# Altium PCB DashDataDisplayPCB.PcbDoc (part 2 of 4)
Units mm, origin at the board's own origin, x right, y up, seen from the top; angles counter-clockwise.
Board outline 152.4 x 101.6 mm, 2 copper layers (Top Layer, Bottom Layer); 143 components, 97 nets, 509 pads, 233 vias.
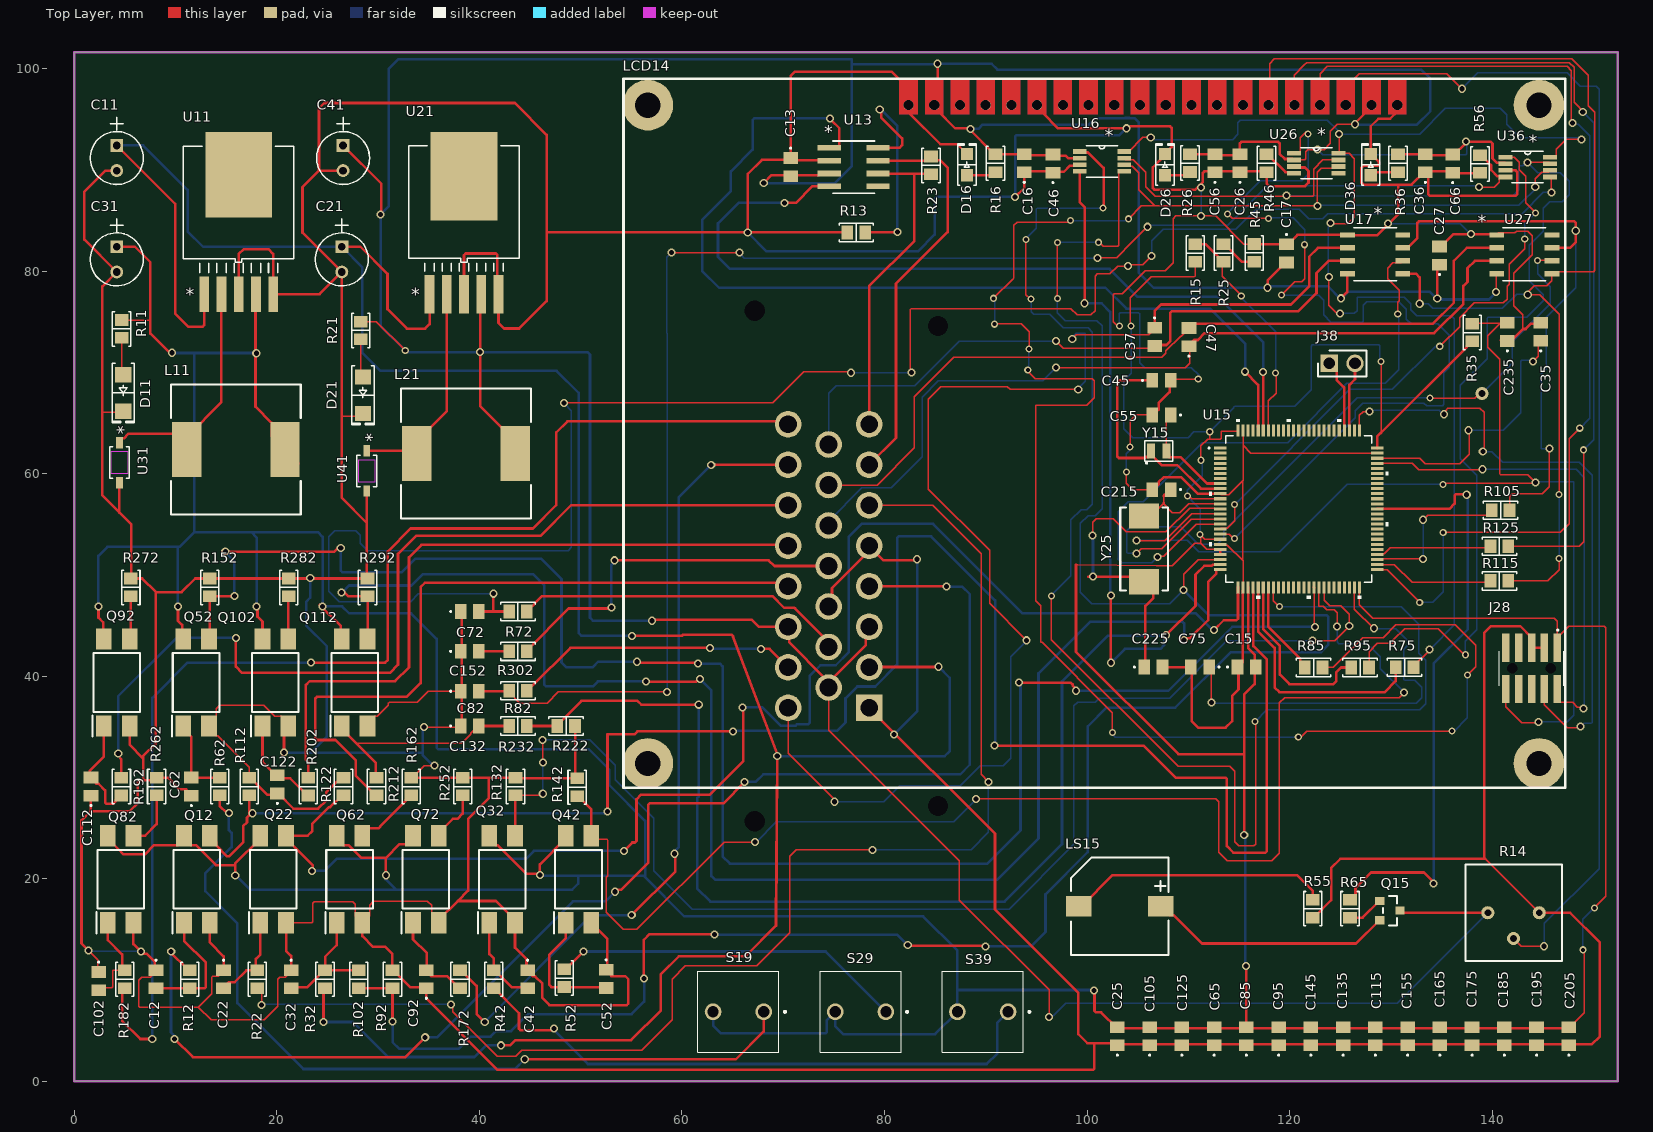
[diagram p0: Top Layer view]

## Part data (continued)
R45: library part AA0805JR-070RL, "RES SMD 0 OHM JUMPER 1/8W 0805", Device Package="0805 (2012 Metric)", manufacturer=Yageo, Operating Temperature="-55°C ~ 155°C", Ratings=AEC-Q200, Supplier Device Package=0805, Supplier Part Number 1=13-AA0805JR-070RLCT-ND, Tolerance=Jumper, componentlink1description=Datasheet, componentlink1url=https://www.yageo.com/upload/media/product/productsearch/datasheet/rchip/PYu-AA_51_RoHS_L_3.pdf, componentlink2description="DigiKey Link", componentlink2url=https://www.digikey.com/en/products/detail/yageo/AA0805JR-070RL/5890455, Composition="Thick Film", Features="Anti-Sulfur, Automotive AEC-Q200, Moisture Resistant", Height - Seated (Max)="0.024\" (0.60mm)", lastupdated="2/8/2024 21:00:22", Lifecycle Status=Active, Minimum Order=1, Number of Terminations=2, Package / Case="0805 (2012 Metric)", packaging=TapeAndReel, Part Number=AA0805JR-070RL, Part Status=Active, partid=74756, price=0.01, Resistance="0 Ohms", series=AA, Size / Dimension="0.079\" L x 0.049\" W (2.00mm x 1.25mm)", Supplier 1=DigiKey
R46 R56 R102 R232: library part 9-2176375-1, "RES 10K OHM 0.1% 1/5W 0805", Device Package="0805 (2012 Metric)", manufacturer="TE Connectivity Passive Product", Operating Temperature="-55°C ~ 155°C", Power (Watts)="0.2W, 1/5W", Ratings=AEC-Q200, Supplier Device Package=0805, Supplier Part Number 1=1712-9-2176375-1CT-ND, Temperature Coefficient=±10ppm/°C, Tolerance=±0.1%, componentlink1description=Datasheet, componentlink1url=https://www.te.com/usa-en/product-9-2176375-1.datasheet.pdf, componentlink2description="DigiKey Link", componentlink2url=https://www.digikey.com/en/products/detail/te-connectivity-passive-product/9-2176375-1/18110542, Composition="Thin Film", Features="Anti-Sulfur, Automotive AEC-Q200, Moisture Resistant", Height - Seated (Max)="0.026\" (0.65mm)", lastupdated="2/8/2024 21:00:11", Lifecycle Status=Active, Minimum Order=1, Number of Terminations=2, Package / Case="0805 (2012 Metric)", packaging=TapeAndReel, Part Number=9-2176375-1, Part Status=Active, partid=76290, price=0.39, Resistance="10 kOhms", series=RQ73, Size / Dimension="0.079\" L x 0.049\" W (2.00mm x 1.25mm)", Supplier 1=DigiKey
R55 R65: library part AC0805FR-7W100RL, "RES 100 OHM 1% 1/4W 0805", Device Package="0805 (2012 Metric)", manufacturer=Yageo, Operating Temperature="-55°C ~ 155°C", Power (Watts)="0.25W, 1/4W", Ratings=AEC-Q200, Supplier Device Package=0805, Supplier Part Number 1=13-AC0805FR-7W100RLCT-ND, Temperature Coefficient=±100ppm/°C, Tolerance=±1%, componentlink1description=Datasheet, componentlink1url=https://www.yageo.com/upload/media/product/productsearch/datasheet/rchip/PYu-AC_51_RoHS_L_8.pdf, componentlink2description="DigiKey Link", componentlink2url=https://www.digikey.com/en/products/detail/yageo/AC0805FR-7W100RL/12698833, Composition="Thick Film", Features="Automotive AEC-Q200, Moisture Resistant", Height - Seated (Max)="0.024\" (0.60mm)", lastupdated="2/8/2024 21:00:29", Lifecycle Status=Active, Minimum Order=1, Number of Terminations=2, Package / Case="0805 (2012 Metric)", packaging=TapeAndReel, Part Number=AC0805FR-7W100RL, Part Status=Active, partid=60606, price=0.01, Resistance="100 Ohms", series=AC, Size / Dimension="0.079\" L x 0.049\" W (2.00mm x 1.25mm)", Supplier 1=DigiKey
R72 R82 R302: library part RNCF0805BTE750R, "RES 750 OHM 0.1% 1/8W 0805", Device Package="0805 (2012 Metric)", manufacturer="Stackpole Electronics Inc", Operating Temperature="-55°C ~ 155°C", Power (Watts)="0.125W, 1/8W", Ratings=AEC-Q200, Supplier Device Package=0805, Supplier Part Number 1=RNCF0805BTE750RCT-ND, Temperature Coefficient=±25ppm/°C, Tolerance=±0.1%, componentlink1description=Datasheet, componentlink1url=https://www.seielect.com/catalog/sei-rncf.pdf, componentlink2description="DigiKey Link", componentlink2url=http://digikey.com/product-detail/en/stackpole-electronics-inc/RNCF0805BTE750R/RNCF0805BTE750RCT-ND/2027163, Composition="Thin Film", Features="Automotive AEC-Q200", Height - Seated (Max)="0.026\" (0.65mm)", lastupdated="2/8/2024 21:02:34", Lifecycle Status=Active, Minimum Order=1, Number of Terminations=2, Package / Case="0805 (2012 Metric)", packaging=TapeAndReel, Part Number=RNCF0805BTE750R, Part Status=Active, partid=28885, price=0.08, Resistance="750 Ohms", series=RNCF, Size / Dimension="0.079\" L x 0.049\" W (2.00mm x 1.25mm)", Supplier 1=DigiKey
R75 R85 R95 R105 R115 R125: library part WJC0805LJUMPFNR, "RES 0 OHM JUMPER 0805", Device Package="0805 (2012 Metric)", manufacturer="Littelfuse Inc.", Operating Temperature="-55°C ~ 170°C", Supplier Device Package=0805, Supplier Part Number 1=18-WJC0805LJUMPFNRCT-ND, Tolerance=Jumper, componentlink1description=Datasheet, componentlink1url=https://media.digikey.com/pdf/Data%20Sheets/Littelfuse%20PDFs/WJC_Series_3-17-23.pdf, componentlink2description="DigiKey Link", componentlink2url=https://www.digikey.com/en/products/detail/littelfuse-inc/WJC0805LJUMPFNR/18795443, Composition="Metal Foil", Features="Current Sense, High Voltage", Height - Seated (Max)="0.024\" (0.60mm)", lastupdated="2/8/2024 20:59:56", Lifecycle Status=Active, Minimum Order=1, Number of Terminations=2, Package / Case="0805 (2012 Metric)", packaging=TapeAndReel, Part Number=WJC0805LJUMPFNR, partid=80166, price=0.07, Resistance="0 Ohms", series=WJC, Size / Dimension="0.079\" L x 0.049\" W (2.00mm x 1.25mm)", Supplier 1=DigiKey
R92 R222: library part CPF0805B1K2E1, "RES SMD 1.2K OHM 0.1% 1/10W 0805", Device Package="0805 (2012 Metric)", manufacturer="TE Connectivity Passive Product", Operating Temperature="-55°C ~ 155°C", Power (Watts)="0.1W, 1/10W", Supplier Device Package=0805, Supplier Part Number 1=A103167CT-ND, Temperature Coefficient=±25ppm/°C, Tolerance=±0.1%, componentlink1description=Datasheet, componentlink1url=https://www.te.com/commerce/DocumentDelivery/DDEController?Action=srchrtrv&DocNm=1773200&DocType=DS&DocLang=English, componentlink2description="DigiKey Link", componentlink2url=https://www.digikey.com/en/products/detail/te-connectivity-passive-product/CPF0805B1K2E1/2382033, Composition="Thin Film", Height - Seated (Max)="0.026\" (0.65mm)", lastupdated="2/8/2024 21:00:58", Lifecycle Status=Active, Minimum Order=1, Number of Terminations=2, Package / Case="0805 (2012 Metric)", packaging=TapeAndReel, Part Number=CPF0805B1K2E1, Part Status=Active, partid=48602, price=0.12, Resistance="1.2 kOhms", series="CPF, Neohm", Size / Dimension="0.079\" L x 0.049\" W (2.00mm x 1.25mm)", Supplier 1=DigiKey
R112 R122 R132 R142 R152 R162 R252 R262 R272 R282 R292: library part 3430A2F10KTDF, "3430 A2 1% 10K 100PPM 1K RL", Device Package="0805 (2012 Metric)", manufacturer="TE Connectivity Passive Product", Operating Temperature="-55°C ~ 155°C", Power (Watts)=1W, Ratings=AEC-Q200, Supplier Device Package=0508, Supplier Part Number 1=1712-3430A2F10KTDFCT-ND, Temperature Coefficient=±100ppm/°C, Tolerance=±1%, componentlink2description="DigiKey Link", componentlink2url=https://www.digikey.com/en/products/detail/te-connectivity-passive-product/3430A2F10KTDF/17764190, Composition="Thick Film", Features="Automotive AEC-Q200", Height - Seated (Max)="0.026\" (0.65mm)", lastupdated="2/8/2024 21:00:03", Lifecycle Status=Active, Minimum Order=1, Number of Terminations=2, Package / Case="0805 (2012 Metric)", packaging=TapeAndReel, Part Number=3430A2F10KTDF, Part Status=Active, partid=77781, price=0.02, Resistance="10 kOhms", series=3430, Size / Dimension="0.049\" L x 0.079\" W (1.25mm x 2.00mm)", Supplier 1=DigiKey
S19 S29 S39: "Switch", Manufacturer_Name="Omron Electronics", Mouser Part Number=653-B3WN-6002, Arrow Part Number=B3WN-6002, Arrow Price/Stock=https://www.arrow.com/en/products/b3wn-6002/omron?region=europe, Datasheet Link=http://omronfs.omron.com/en_US/ecb/products/pdf/en-b3wn.pdf, Height=13.2mm, Manufacturer_Part_Number=B3WN-6002, Mouser Price/Stock=https://www.mouser.co.uk/ProductDetail/Omron-Electronics/B3WN-6002?qs=CX134%252BdLMDH3t3DGk60Xxw%3D%3D
U11 U13 U21: "No Description Available", Mfr_Name=Microchip, RefDes=RefDes, Type=Type
U15: "No Description Available", Mfr_Name=STMicroelectronics, RefDes=RefDes, Type=Type
U16 U26 U36: "No Description Available", Mfr_Name="Texas Instruments", RefDes=RefDes, Type=ADC122S101CIMM
U17 U27: "No Description Available", Mfr_Name="Analog Devices Inc", RefDes=RefDes, Type=Type
U31 U41: "No Description Available", Mfr_Name="Diodes Inc", RefDes=RefDes, Type=Type
Y15: library part CM8V-T1A-32.768KHZ-12.5PF-20PPM-TA-QA, "CRYSTAL 32.7680KHZ 12.5PF SMD", ESR (Equivalent Series Resistance)="70 kOhms", Frequency Tolerance=±20ppm, Load Capacitance=12.5pF, manufacturer="Micro Crystal AG", Operating Mode=Fundamental, Operating Temperature="-40°C ~ 85°C", Package / Case="2-SMD, No Lead", Ratings=AEC-Q200, Supplier Part Number 1=2195-CM8V-T1A-32.768KHZ-12.5PF-20PPM-TA-QACT-ND, componentlink1description=Datasheet, componentlink1url=https://www.microcrystal.com/fileadmin/Media/Products/32kHz/Datasheet/CM8V-T1A.pdf, componentlink2description="DigiKey Link", componentlink2url=https://www.digikey.com/en/products/detail/micro-crystal-ag/CM8V-T1A-32-768KHZ-12-5PF-20PPM-TA-QA/10499086, Frequency="32.768 kHz", Height - Seated (Max)="0.024\" (0.60mm)", lastupdated="3/11/2024 08:14:55", Lifecycle Status=Active, Minimum Order=1, Mounting Type="Surface Mount", packaging=TapeAndReel, Part Number=CM8V-T1A-32.768KHZ-12.5PF-20PPM-TA-QA, Part Status=Active, partid=834, price=0.30, series=CM8V, Size / Dimension="0.079\" L x 0.047\" W (2.00mm x 1.20mm)", Supplier 1=DigiKey, Type="kHz Crystal (Tuning Fork)"
Y25: library part NX8045GB-8.000000MHZ, "CRYSTAL 8.0000MHZ 8PF SMD", ESR (Equivalent Series Resistance)="200 Ohms", Frequency Stability=±50ppm, Load Capacitance=8pF, manufacturer="NDK America, Inc.", Operating Mode=Fundamental, Operating Temperature="-10°C ~ 70°C", Package / Case="2-SMD, No Lead", Supplier Part Number 1=644-1018-1-ND, componentlink1description=Datasheet, componentlink1url=//media.digikey.com/pdf/Data%20Sheets/NDK%20PDFs/NX8045GB.pdf, componentlink2description="DigiKey Link", componentlink2url=http://digikey.com/product-detail/en/ndk-america-inc/NX8045GB-8.000000MHZ/644-1018-1-ND/1128890, Frequency=8MHz, Frequency Tolerance=±50ppm, Height - Seated (Max)="0.079\" (2.00mm)", lastupdated="3/11/2024 07:54:40", Lifecycle Status=Active, Minimum Order=1, Mounting Type="Surface Mount", packaging=TapeAndReel, Part Number=NX8045GB-8.000000MHZ, Part Status=Active, partid=653, price=0.30, series=NX8045GB, Size / Dimension="0.315\" L x 0.177\" W (8.00mm x 4.50mm)", Supplier 1=DigiKey, Type="MHz Crystal"

## Via types
v1: diameter 0.8, hole 0.5, Top Layer to Bottom Layer, 177 vias
v2: diameter 0.7, hole 0.4, Top Layer to Bottom Layer, 55 vias
v3: diameter 1.27, hole 0.711, Top Layer to Bottom Layer, 1 vias

## Nets (pads, with @x,y where several pads share a name; then routed paths per layer and width w, separated by ;. In a path a pad name is that pad's centre, name@x,y a point inside that pad or via, vN(x,y) a via of type N, cw(c..) or ccw(c..) an arc to the next point about the centre after c; other vN are vias at no path point)
+5: C13.2 C16.2 C17.2 C26.2 C27.1 C36.2 C41.1 C46.2 C56.2 C66.2 J18.3 J18.9 J18.18 L21.2 LCD14.2 LCD14.19 Q15.3 R14.1 R16.2 R21.2 R26.2 R36.2 U13.3 U16.2 U17.4 U21.4 U26.2 U27.4 U36.2 | length 533
  Top Layer w0.127: R21.2@28.28,75.01 29.83,75.01 v2(32.68,72.16) ; J18.9@74.483,38.873 74.483,34.677 87.4,21.76 87.4,17.89 96.25,9.04 v1@96.25,6.22 ; U26.2@120.448,90.968 121.488,90.968 121.6,91.08 121.6,91.8 121.77,91.97 123.4,91.97 124.03,92.6 124.03,93.82 124.703,94.493 v1(126.46,94.493) ; v1(140.393,77.917) 140.393,79.542 140.372,79.563 140.28,79.563 U27.4@140.462,79.745
  Top Layer w0.254: C41.1@26.543,92.405 30.33,88.618 30.33,85.68 v1(30.25,85.6) ; U21.4@40.183,77.699 40.07,77.586 v1(40.07,71.99) 40.07,66.69 43.53,63.23 L21.2@43.53,61.98 ; v1(57.06,45.47) 57.16,45.57 66.89,45.57 67.587,44.873 J18.18@70.483,44.873 70.602,44.754 70.602,43.328 74.148,39.782 74.148,39.208 J18.9@74.483,38.873 74.483,39.375 78.148,43.04 78.148,44.538 J18.3@78.483,44.873 ; v1(68.08,88.69) 68.852,89.462 73.52,89.462 73.685,89.627 U13.3@74.549,89.627 ; LCD14.19@84.91,96.38 84.91,96.178 85.174,95.914 85.174,95.906 86.979,94.101 88.286,94.101 90.869,91.518 R16.2@90.969,91.518 93.726,91.518 93.801,91.443 96.594,91.443 96.632,91.405 97.881,91.405 98.135,91.151 U16.2@99.276,91.151 ; 85.24,98.5 v1(85.24,100.47) ; R26.2@110.164,91.532 112.544,91.532 112.633,91.443 115.101,91.443 115.101,92.601 115.25,92.75 118.871,92.75 119.02,92.601 119.02,91.579 119.537,91.062 120.264,91.062 U26.2@120.358,90.968 ; v1@117.83,78.27 117.83,79.078 119.118,80.366 119.118,80.416 119.641,80.939 C17.2@119.691,80.939 ; v1(125.07,77.31) 125.07,77.316 125.68,77.926 125.68,79.605 125.73,79.655 U17.4@125.73,79.745 ; v1(126.46,94.493) 126.46,94.595 128.09,96.225 LCD14.2@128.09,96.38 ; R36.2@130.713,91.518 133.335,91.518 133.41,91.443 136.069,91.443 136.107,91.405 136.157,91.405 137.41,92.658 v1(137.41,92.78) 139.85,92.78 140.04,92.59 140.04,91.133 140.492,90.681 141.218,90.681 U36.2@141.313,90.587 ; Q15.3@130.903,16.842 131.108,16.637 R14.1@139.573,16.637 ; v1(134.58,77.29) 134.58,80.499 C27.1@134.804,80.723
  Bottom Layer w0.127: v1(96.24,6.36) 96.369,6.489 96.689,6.489 97.92,7.72 130.656,7.72 R14.1@139.573,16.637 ; v1(122.74,92) 123.26,91.48 137.39,91.48 137.49,91.58 137.49,92.7 v1(137.41,92.78)
  Bottom Layer w0.254: v1(57.06,45.47) 51.219,45.47 50.92,45.769 50.92,71.74 50.67,71.99 v1(40.07,71.99) 32.83,71.99 30.25,74.57 v1(30.25,85.6) 31.06,86.41 31.06,99.98 31.98,100.9 76.776,100.9 76.776,100.43 ; v1(68.08,88.69) 75.1,88.69 76.776,90.366 76.776,100.43 ; v1(88.5,94.02) 88.511,94.031 89.281,94.031 89.7,94.45 100.17,94.45 100.819,95.099 103.748,95.099 103.761,95.113 104.159,95.113 104.172,95.099 104.701,95.099 105.09,94.71 105.09,79.84 106.58,78.35 v1(117.82,78.35) 117.924,78.454 118.196,78.454 118.242,78.5 123.78,78.5 v1@125.02,77.26 ; v1(125.07,77.31) 125.152,77.31 125.812,77.97 133.838,77.97 134.518,77.29 v1(134.58,77.29) 134.68,77.19 139.694,77.19 140.393,77.889 v1(140.393,77.917) ; v1(126.46,94.493) 126.524,94.43 132.55,94.43 133.9,95.78 133.9,98.99 132.995,99.895 91.155,99.895 90.58,100.47 v1(85.24,100.47) 85.2,100.43 76.776,100.43